# Altium PCB DATN_PCB_ver1.PcbDoc (part 1 of 2)
Units mm, origin at the board's own origin, x right, y up, seen from the top; angles counter-clockwise.
Board outline 70 x 59.97 mm, 2 copper layers (Top Layer, Bottom Layer), stack 1.569 mm thick; 103 components, 87 nets, 412 pads, 112 vias.
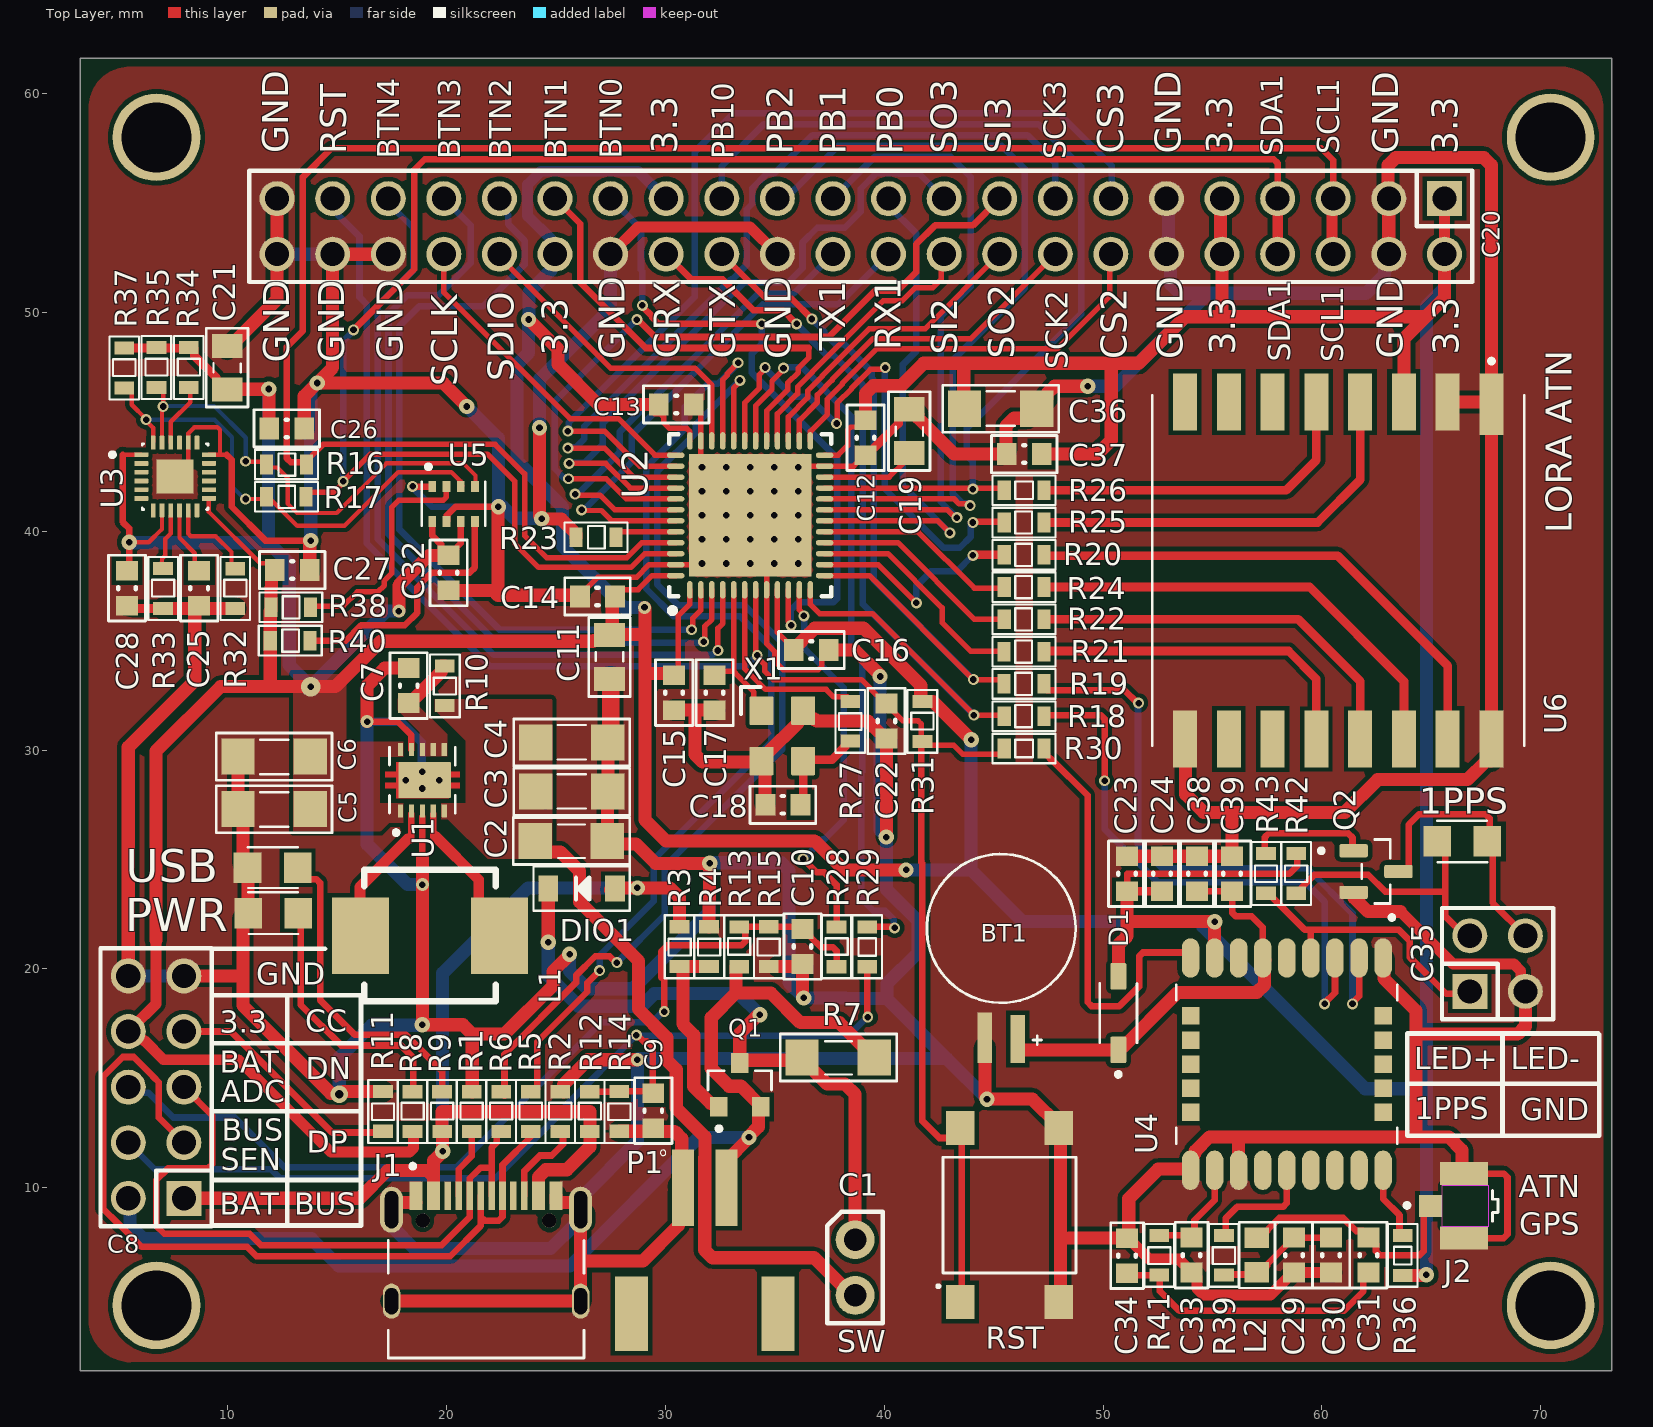
[diagram p0: Top Layer view]
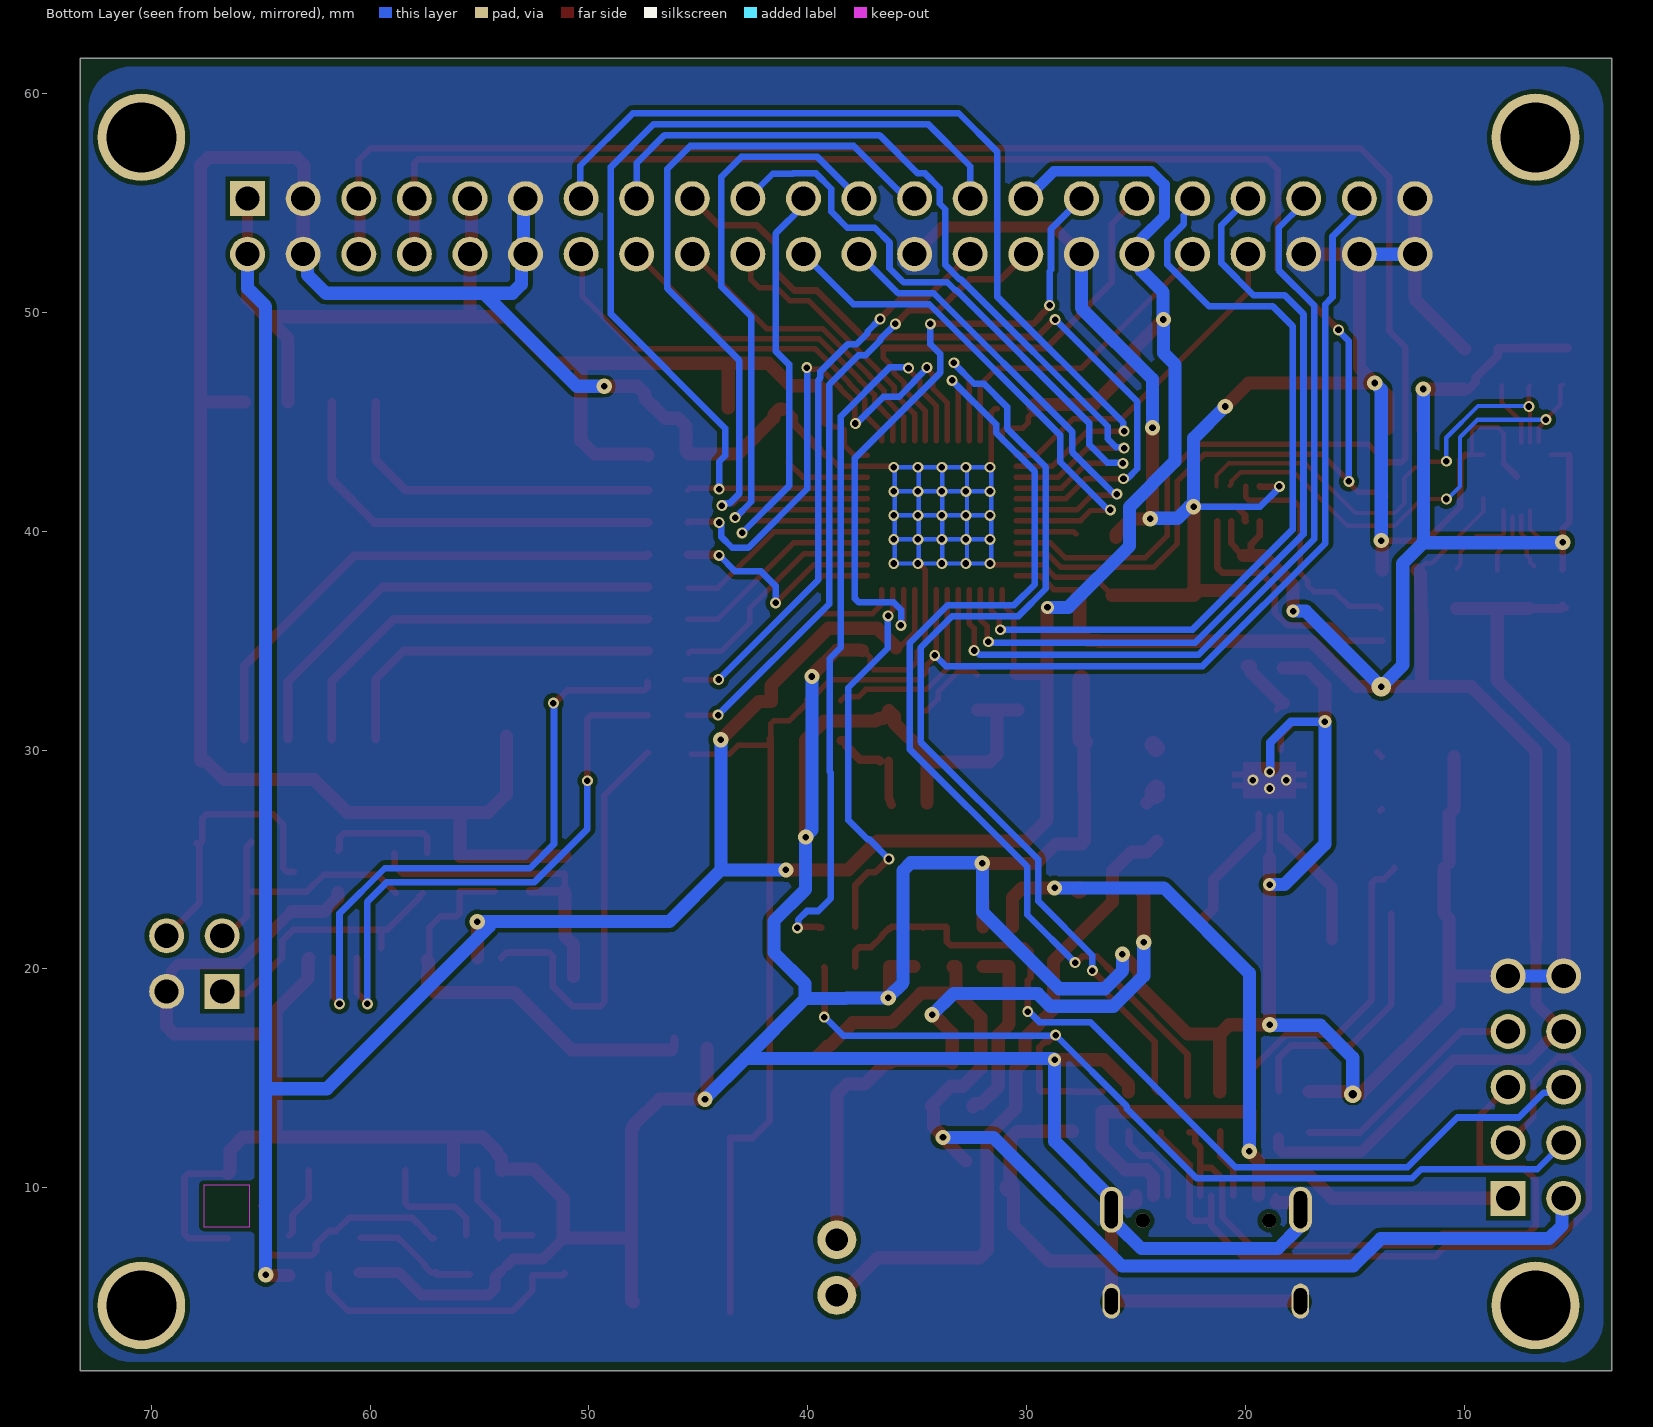
[diagram p1: Bottom Layer view, seen from below]
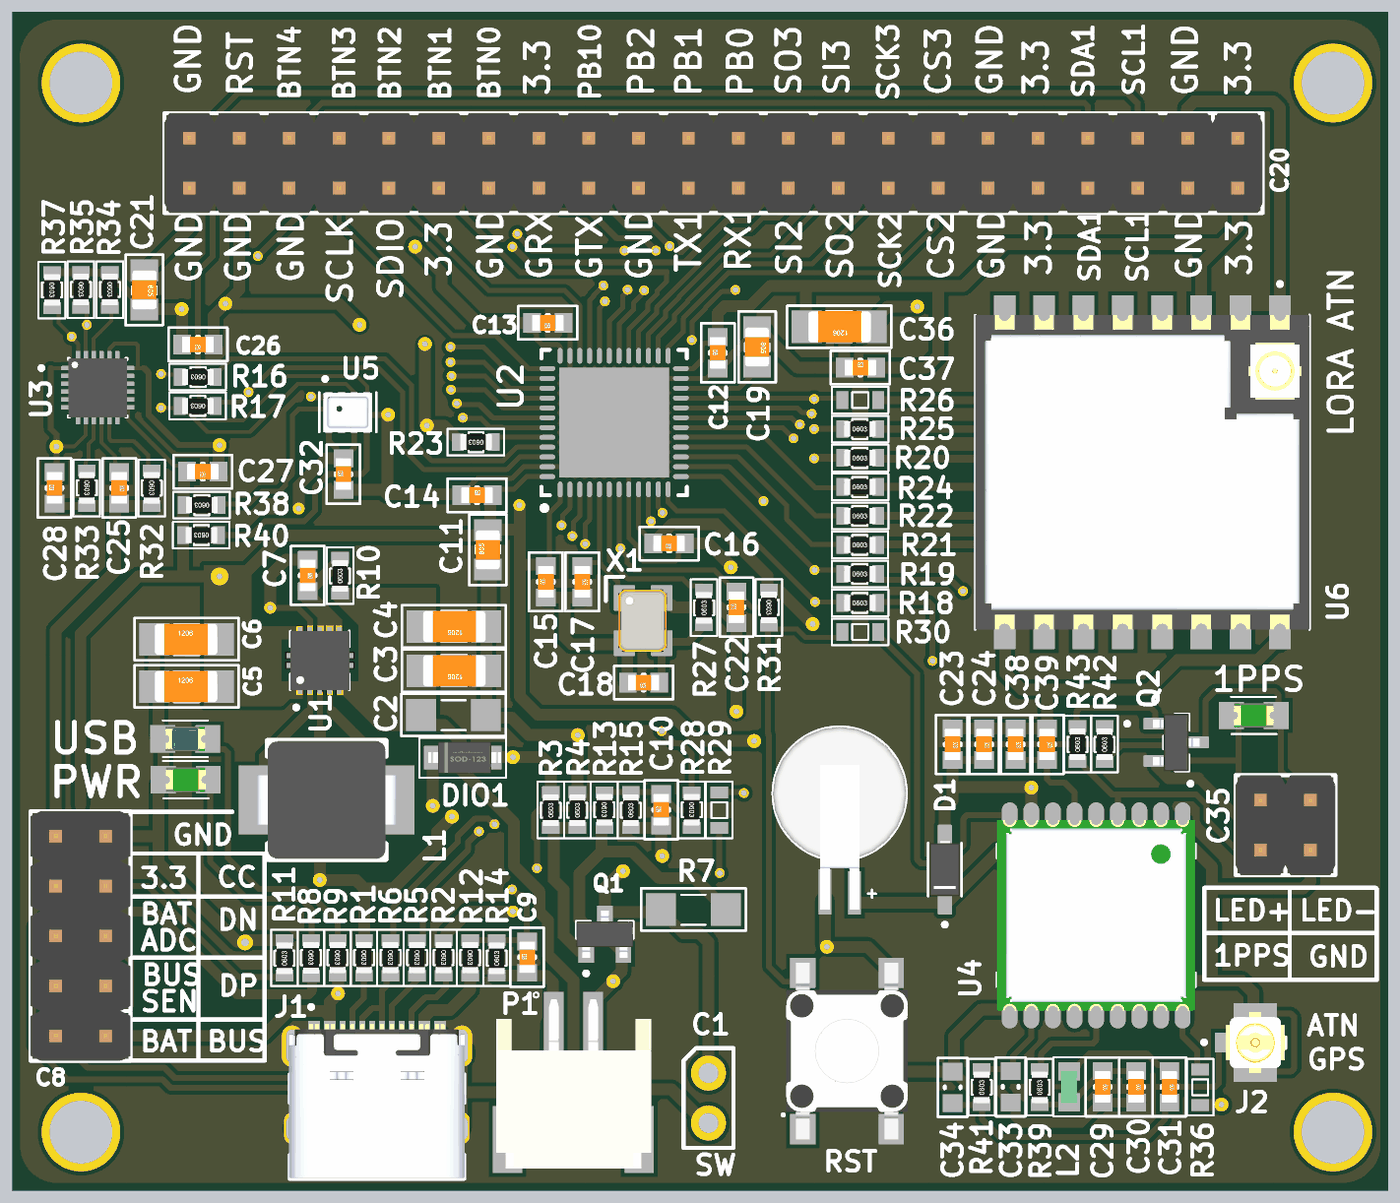
[diagram p3: 3D render of the assembled board from above, using the file's embedded part models]

## Layer stack, top to bottom
Top Solder: solder mask 0.0254, SM-001, Dk 4
Top Layer: signal copper 0.035
Dielectric 1: core 1.4986, Core-043, Dk 4.3
Bottom Layer: signal copper 0.035
Bottom Solder: solder mask 0.0254, SM-001, Dk 4

## Board outline
3.258,1.648 73.254,1.648 73.254,61.621 3.258,61.621

## Design rules (kind name [scope] priority, off if disabled: settings)
BoardOutlineClearance [All] p1: gap=0.254 ignorepadtopadclearanceinfootprint=FALSE except(0: Arc-SplitContinuation Track-SplitContinuation SMDPad-SplitContinuation THPad-SplitContinuation Via-SplitContinuation Fill-SplitContinuation Poly-SplitContinuation Region-SplitContinuation Text-SplitContinuation)
Clearance [All] p1: gap=0.2 ignorepadtopadclearanceinfootprint=TRUE except(0.19: Arc-SMDPad Track-SMDPad)
HoleSize [All] p1: absolutevalues=TRUE maxlimit=6.3 minlimit=0.3 maxpercent=80.000 minpercent=20.000
HoleToHoleClearance [All] p1: gap=0.25 allowstackedmicrovias=TRUE
MinimumSolderMaskSliver [All] p1: minsoldermaskwidth=0.1
PlaneConnect [All] p1: planeconnectstyle=Direct reliefexpansion=0.508 reliefentries=2 reliefconductorwidth=0.254 reliefairgap=0.254
PolygonConnect [All] p1: connectstyle=Direct reliefconductorwidth=0.254 reliefentries=4 polygonreliefangle="90 Angle" airgapwidth=0
RoutingVias [All] p1: holewidth=0.4 width=1.27 viastyle="Through Hole" minholewidth=0.2 minwidth=0.4 maxholewidth=6.3 maxwidth=6.3
ShortCircuit [InPadClass('All Pads') vs InPadClass('All Pads')] p1: allowed=FALSE
SilkToSilkClearance [All] p1: silktosilkclearance=0.1
SilkToSolderMaskClearance [IsPad] p1: minsilkscreentomaskgap=0.15 clearancetoexposedcopper=TRUE
SolderMaskExpansion [All] p1: expansion=0 istentingtop=FALSE
SupplyNets "Schematic Supply Nets_5" [InNet('VBUS')] p1: voltage=0.000
SupplyNets "Schematic Supply Nets_4" [InNet('GND_OUT')] p2: voltage=0.000
SupplyNets "Schematic Supply Nets_3" [InNet('V_PWR')] p3: voltage=0.000
SupplyNets "Schematic Supply Nets_2" [InNet('3.3V_OUT')] p4: voltage=0.000
SupplyNets "Schematic Supply Nets_1" [InNet('GPS_VBAT')] p5: voltage=0.000
SupplyNets "Schematic Supply Nets" [InNet('VBAT')] p6: voltage=0.000
UnRoutedNet [All] p1: checkbadconnections=TRUE
Width [All] p1: maxlimit=1 minlimit=0.2 preferedwidth=0.3
22 further rules are at their usual default settings.

## Components (designator, comment, footprint, x,y, rotation, side; value= is the part's Value field where it differs from the comment)
1PPS "LED" LED-0805-Green 65.275,25.825 r0 top value="LED 3 - 5 ly 2 Colour" (schematic designator LED3)
BT1 "MS621FE-FL11E" BAT_MS621FE-FL11E 45.35,21.85 r270 top
C1 "JP2" JP2-CLOSED 38.675,7.625 r0 top
C2 "Pad" PAD-SMD-1206 25.725,25.85 r180 top value=33pF
C3 "100uF" CN-SMD-1206 25.75,28.1 r180 top value=33pF
C4 "10uF" CN-SMD-1206 25.75,30.35 r180 top value=33pF
C5 "10uF" CN-SMD-1206 12.1,27.3 r0 top value=33pF
C6 "10uF" CN-SMD-1206 12.1,29.7 r0 top value=33pF
C7 "100nF" CN-SMD-0603 18.275,32.95 r270 top value=33pF
C8 "JP5x2" JP5-D2T 6.73,14.6 r90 top
C9 "100nF" CN-SMD-0603 29.45,13.525 r90 top value=33pF
C10 "100nF" CN-SMD-0603 36.275,21.025 r90 top value=33pF
C11 "2.2uF" CN-SMD-0805 27.45,34.25 r90 top value=33pF
C12 "100nF" CN-SMD-0603 39.15,44.275 r90 top value=33pF
C13 "100nF" CN-SMD-0603 30.5,45.8 r180 top value=33pF
C14 "100nF" CN-SMD-0603 26.9,37.025 r0 top value=33pF
C15 "100nF" CN-SMD-0603 30.4,32.625 r90 top value=33pF
C16 "100nF" CN-SMD-0603 36.675,34.575 r180 top value=33pF
C17 "15pF" CN-SMD-0603 32.25,32.625 r270 top value=33pF
C18 "15pF" CN-SMD-0603 35.375,27.5 r180 top value=33pF
C19 "2.2uF" CN-SMD-0805 41.15,44.575 r270 top value=33pF
C20 "JP22x2" JP22-D2T 38.93,53.93 r180 top
C21 "2.2uF" CN-SMD-0805 9.975,47.475 r270 top value=33pF
C22 "100nF" CN-SMD-0603 40.1,31.331 r90 top value=33pF
C23 "100nF" CN-SMD-0603 51.1,24.35 r270 top value=33pF
C24 "33nF" CN-SMD-0603 52.7,24.35 r270 top value=33pF
C25 "100nF" CN-SMD-0603 8.7,37.4 r270 top value=33pF
C26 "100nF" CN-SMD-0603 12.7,44.7 r180 top value=33pF
C27 "10nF" CN-SMD-0603 12.95,38.225 r180 top value=33pF
C28 "10nF" CN-SMD-0603 5.4,37.4 r90 top value=33pF
C29 "100pF" CN-SMD-0603 58.725,6.925 r270 top value=33pF
C30 "10nF" CN-SMD-0603 60.425,6.925 r270 top value=33pF
C31 "100pF" CN-SMD-0603 62.125,6.925 r270 top value=33pF
C32 "100nF" CN-SMD-0603 20.1,38.1 r90 top value=33pF
C33 "PAD" PAD-CAP-SMD-0603 54.05,6.925 r270 top value=33pF
C34 "PAD" PAD-CAP-SMD-0603 51.1,6.9 r90 top value=33pF
C35 "JP2x2" JP2-D2T 68.03,20.245 r0 top
C36 "22uF" CN-SMD-1206 45.35,45.6 r180 top value=33pF
C37 "100nF" CN-SMD-0603 46.4,43.525 r0 top value=33pF
C38 "100nF" CN-SMD-0603 54.3,24.35 r270 top value=33pF
C39 "33nF" CN-SMD-0603 55.9,24.35 r270 top value=33pF
D1 "1N4148W-7" SOD3715X135N 50.7,17.98 r90 top
DIO1 "Diode SMD" DIO-SMD-123 26.175,23.675 r0 top value=1N5007
J1 "CQ-USB-C16PSMT01" SHENZHEN-CHUANGQIN-TECHNOLOGY_CQ-USB-C16PSMT01 21.81,9.64 r0 top
J2 "IPEX" IPEX_20279-001E-03 66.5,9.175 r270 top
L1 "2.2uH" INDC6060X300 19.25,21.525 r0 top
L2 "68nH" SMD_Inductor_0603 57.025,6.925 r90 top
P1 "S2B-PH-SM4-TB" JST_S2B-PH-SM4-TB 31.8,10 r180 top
PWR "LED GREEN" LED-0805-Green 13.225,22.55 r180 top value="LED 3 - 5 ly 2 Colour" (schematic designator LED1)
Q1 "P_MOSFET" P_MOSFET_SOT23 33.4,14.7 r90 top
Q2 "N_MOSFET" SOT-23-3 62.475,24.45 r0 top
R1 "5.1K" RES-SMD-0603 21.15,13.502 r270 top
R2 "5.1K" RES-SMD-0603 25.2,13.502 r270 top
R3 "22R" RES-SMD-0603 30.65,21 r90 top
R4 "10K" RES-SMD-0603 32,21 r90 top
R5 "22R" RES-SMD-0603 23.85,13.502 r270 top
R6 "22R" RES-SMD-0603 22.5,13.502 r270 top
R7 "Pad" PAD-SMD-1206 37.925,15.95 r180 top
R8 "1.5K" RES-SMD-0603 18.45,13.5 r270 top
R9 "2K" RES-SMD-0603 19.8,13.502 r270 top
R10 "100R" RES-SMD-0603 19.925,32.923 r90 top
R11 "5.1K" RES-SMD-0603 17.1,13.475 r90 top
R12 "80K" RES-SMD-0603 26.55,13.502 r270 top
R13 "66K" RES-SMD-0603 33.375,21.025 r270 top
R14 "200K" RES-SMD-0603 27.9,13.475 r90 top
R15 "200K" RES-SMD-0603 34.725,21 r90 top
R16 "0R" RES-SMD-0603 12.707,43.047 r180 top
R17 "0R" RES-SMD-0603 12.7,41.575 r180 top
R18 "0R" RES-SMD-0603 46.375,31.55 r0 top
R19 "0R" RES-SMD-0603 46.373,33.025 r0 top
R20 "0R" RES-SMD-0603 46.375,38.925 r0 top
R21 "0R" RES-SMD-0603 46.373,34.5 r0 top
R22 "0R" RES-SMD-0603 46.375,35.975 r0 top
R23 "10K" RES-SMD-0603 26.85,39.725 r180 top
R24 "0R" RES-SMD-0603 46.375,37.45 r0 top
R25 "0R" RES-SMD-0603 46.375,40.4 r0 top
R26 "PAD" PAD-RES-SMD-0603 46.375,41.875 r0 top
R27 "0R" RES-SMD-0603 38.45,31.3 r90 top
R28 "0R" RES-SMD-0603 37.825,21.025 r270 top
R29 "PAD" PAD-RES-SMD-0603 39.225,21.025 r270 top
R30 "PAD" PAD-RES-SMD-0603 46.375,30.075 r0 top
R31 "10K" RES-SMD-0603 41.75,31.325 r270 top
R32 "10K" RES-SMD-0603 10.35,37.4 r270 top
R33 "10K" RES-SMD-0603 7.05,37.402 r270 top
R34 "10K" RES-SMD-0603 8.225,47.5 r270 top
R35 "4.7K" RES-SMD-0603 6.75,47.5 r270 top
R36 "PAD" PAD-RES-SMD-0603 63.7,6.925 r270 top
R37 "4.7K" RES-SMD-0603 5.275,47.477 r270 top
R38 "10K" RES-SMD-0603 12.9,36.525 r180 top
R39 "10R" RES-SMD-0603 55.525,6.9 r90 top
R40 "10K" RES-SMD-0603 12.875,35 r180 top
R41 "0R" RES-SMD-0603 52.575,6.898 r90 top
R42 "1K" RES-SMD-0603 58.825,24.35 r90 top
R43 "1K" RES-SMD-0603 57.45,24.35 r90 top
RST "SW" SW2-SMD 45.725,8.75 r90 top value="Button chip 4 pin" (schematic designator SW1)
U1 "TPS63001DRCR" VREG_V62/16624-01YE 18.9,28.625 r90 top
U2 "STM32F411CEU6" STM-UFQFPN48_L 33.875,40.725 r90 top
U3 "MPU-9250" QFN40P300X300X105-25N 7.6,42.5 r0 top
U4 "LC76G" XCVR_LC76G 58.4,15.65 r270 top
U5 "BMP280" XDCR_BMP280 20.325,41.25 r90 top
U6 "RA-02_LORA" MODULE_RA-02_LORA 60.75,38.2 r270 top
USB "LED GREEN" LED-0805-Blue 13.2,24.625 r180 top value="LED 3 - 5 ly 2 Colour" (schematic designator LED2)
X1 "XTAL_3225_25MHZ" XTAL_3225 35.35,30.65 r270 top

## Footprints (in the part's own frame and the unit in brackets; to place one, negate y for a bottom-side part, rotate by r counter-clockwise, add the part's x,y. Pads: shape width x height; smd on the part's side, far side on the other; paste and mask are expansions set on the pad)
BAT_MS621FE-FL11E [mm]
  rect 2.3x0.65 smd: NEG(5,-0.75)
  rect 2.2x0.65 smd: POS(5.05,0.75)
  silkscreen extent -3.4,-3.4 5.3,3.4, body extent -3.4,-3.4 5.9,3.4, height 2.8
CN-SMD-0603 [mm]
  rect 0.9x1 smd: 1(-0.8,0) 2(0.8,0)
  silkscreen extent -1.5,-0.85 1.5,0.85, body extent -0.8,-0.4 0.8,0.4, height 0.3
CN-SMD-0805 [mm]
  rect 1.1x1.397 smd: 1(-1,0) 2(1,0)
  silkscreen extent -1.8,-0.95 1.8,0.95, body extent -1,-0.62 1,0.63, height 0.8
CN-SMD-1206 [mil]
  rect 60x65 smd: 1(-64,0) 2(66,0)
  silkscreen extent -103,-42 105,42, body extent -63,-31 63,32, height 40
DIO-SMD-123 [mm]
  rect 0.9x1.2 smd: 1(1.524,0) 2(-1.524,0)
  silkscreen extent -2.2,-1.02 2.2,1.02, body extent -1.76,-0.8 1.94,0.8, height 1.25
INDC6060X300 [mm]
  rect 2.6x3.5 smd: 1(-3.175,0) 2(3.175,0)
  silkscreen extent -3,-3 3,3, body extent -3.55,-3 3.55,3, height 3
IPEX_20279-001E-03 [mm]
  rect 1x1.05 smd: 1(0,-1.525)
  rect 1.05x2.2 smd: 2(1.475,0) 3(-1.475,0)
  Keep-Out Layer region: 0.95,-1 -0.95,-1 -0.95,1.1 0.95,1.1
  silkscreen extent -0.7,-2.71 0.7,1.55, body extent -1.5,-1.55 1.5,1.55, height 1.25
JP2-CLOSED [mil]
  round 70 hole 40: 1(0,0) 2(0,-100)
  silkscreen extent -50,-150 50,50, body extent -50,-152 50,50, height 300
JP2-D2T [mm] "4 pins, dual pin, straight, gold plating"
  rect 1.6x1.6 hole 1.1: 1(-1.27,-1.27)
  round 1.6 hole 1.1: 2(1.27,-1.27) 3(1.27,1.27) 4(-1.27,1.27)
  silkscreen extent -2.54,-2.54 2.54,2.54, body extent -2.54,-2.54 2.54,2.54, height 8.55
JP5-D2T [mm] "10 pins, dual pin, straight, gold plating"
  rect 1.6x1.6 hole 1.1: 1(-5.08,-1.27)
  round 1.6 hole 1.1: 2(-2.54,-1.27) 3(0,-1.27) 4(2.54,-1.27) 5(5.08,-1.27) 6(5.08,1.27) 7(2.54,1.27) 8(0,1.27) 9(-2.54,1.27) 10(-5.08,1.27)
  silkscreen extent -6.35,-2.54 6.35,2.54, body extent -6.35,-2.54 6.35,2.54, height 8.55
JP22-D2T [mm] "44 pins, dual pin, straight, gold plating"
  rect 1.6x1.6 hole 1.1: 1(-26.67,-1.27)
  round 1.6 hole 1.1: 2(-24.13,-1.27) 3(-21.59,-1.27) 4(-19.05,-1.27) 5(-16.51,-1.27) 6(-13.97,-1.27) 7(-11.43,-1.27) 8(-8.89,-1.27) 9(-6.35,-1.27) 10(-3.81,-1.27) 11(-1.27,-1.27) 12(1.27,-1.27) 13(3.81,-1.27) 14(6.35,-1.27) 15(8.89,-1.27) 16(11.43,-1.27) 17(13.97,-1.27) 18(16.51,-1.27) 19(19.05,-1.27) 20(21.59,-1.27) 21(24.13,-1.27) 22(26.67,-1.27) 23(26.67,1.27) 24(24.13,1.27) 25(21.59,1.27) 26(19.05,1.27) 27(16.51,1.27) 28(13.97,1.27) 29(11.43,1.27) 30(8.89,1.27) 31(6.35,1.27) 32(3.81,1.27) 33(1.27,1.27) 34(-1.27,1.27) 35(-3.81,1.27) 36(-6.35,1.27) 37(-8.89,1.27) 38(-11.43,1.27) 39(-13.97,1.27) 40(-16.51,1.27) 41(-19.05,1.27) 42(-21.59,1.27) 43(-24.13,1.27) 44(-26.67,1.27)
  silkscreen extent -27.94,-2.54 27.94,2.54, body extent -27.94,-2.54 27.94,2.54, height 8.55
JST_S2B-PH-SM4-TB [mm]
  rect 1x3.5 smd: 1(1,0) 2(-1,0)
  rect 1.5x3.4 smd: P1(3.35,5.75) P2(-3.35,5.75)
  silkscreen extent 1.77,-1.73 2.03,-1.47, body extent -3.96,-1.38 3.94,7.22, height 5.5
LED-0805-Blue [mil]
  rect 50x55 smd: 1(0,0) 2(90,0)
  silkscreen extent 0,-37 90,36, body extent 5,-25 85,25, height 43
LED-0805-Green [mil]
  rect 50x55 smd: 1(0,0) 2(90,0)
  silkscreen extent 0,-37 91,37, body extent 5,-25 85,25, height 43
MODULE_RA-02_LORA [mm]
  rect 2.8x1.1 smd: 1(-7.6,7)
  rect 2.6x1.1 smd: 2(-7.7,5) 3(-7.7,3) 4(-7.7,1) 5(-7.7,-1) 6(-7.7,-3) 7(-7.7,-5) 8(-7.7,-7) 9(7.7,-7) 10(7.7,-5) 11(7.7,-3) 12(7.7,-1) 13(7.7,1) 14(7.7,3) 15(7.7,5) 16(7.7,7)
  silkscreen extent -9.68,-8.5 8,8.5, body extent -8,-8.5 8,8.5, height 3.3
P_MOSFET_SOT23 [mm]
  rect 0.9x0.8 smd: 1(-1,0.95) 2(-1,-0.95) 3(1,0)
  silkscreen extent -2.1,-1.45 0.65,1.45, body extent -1.2,-1.45 1.2,1.45, height 1.2
PAD-CAP-SMD-0603 [mm]
  rect 0.9x1 smd: 1(-0.8,0) 2(0.8,0)
  silkscreen extent -1.5,-0.75 1.5,0.75
PAD-RES-SMD-0603 [mm]
  rect 0.6x0.9 smd: 1(-0.889,0) 2(0.927,0)
  silkscreen extent -1.43,-0.67 1.45,0.67
PAD-SMD-1206 [mil]
  rect 60x65 smd: 1(-64,0) 2(66,0)
  silkscreen extent -104,-42 105,42
QFN40P300X300X105-25N [mm]
  rrect25% 0.64x0.22 smd: 1(-1.545,1) 2(-1.545,0.6) 3(-1.545,0.2) 4(-1.545,-0.2) 5(-1.545,-0.6) 6(-1.545,-1) 13(1.545,-1) 14(1.545,-0.6) 15(1.545,-0.2) 16(1.545,0.2) 17(1.545,0.6) 18(1.545,1)
  rrect25% 0.22x0.64 smd: 7(-1,-1.545) 8(-0.6,-1.545) 9(-0.2,-1.545) 10(0.2,-1.545) 11(0.6,-1.545) 12(1,-1.545) 19(1,1.545) 20(0.6,1.545) 21(0.2,1.545) 22(-0.2,1.545) 23(-0.6,1.545) 24(-1,1.545)
  rect 1.7x1.54 smd paste-2: 25(0,0)
  silkscreen extent -2.96,-1.5 1.5,1.5, body extent -1.5,-1.5 1.5,1.5, height 1.05
RES-SMD-0603 [mm]
  rect 0.6x0.9 smd: 1(-0.889,0) 2(0.927,0)
  silkscreen extent -1.43,-0.68 1.45,0.67, body extent -0.8,-0.4 0.8,0.4, height 0.43
SHENZHEN-CHUANGQIN-TECHNOLOGY_CQ-USB-C16PSMT01 [mm]
  rect 0.6x1.3 smd: A1_B12(-3.2,0) A4_B9(-2.4,0) B1_A12(3.2,0) B4_A9(2.4,0)
  rect 0.3x1.3 smd: A5(-1.25,0) A6(-0.25,0) A7(0.25,0) A8(1.25,0) B5(1.75,0) B6(0.75,0) B7(-0.75,0) B8(-1.75,0)
  oval 1.05x2.1 hole 0.6 slot 1.7 at 90 deg: S1(-4.32,-0.64) S2(4.32,-0.64)
  oval 0.8x1.6 hole 0.6 slot 1.2 at 90 deg: S3(-4.32,-4.82) S4(4.32,-4.82)
  round 0.65 hole 0.65 unplated: ""(-2.89,-1.14) ""(2.89,-1.14)
  silkscreen extent -4.47,-7.42 4.47,1.45, body extent -4.47,-7.33 4.47,0.48, height 3.26
SMD_Inductor_0603 [mm]
  rect 0.94x1.11 smd: 1(-0.789,0) 2(0.789,0)
  silkscreen extent -1.5,-0.82 1.5,0.8, body extent -0.8,-0.4 0.8,0.4, height 1
SOD3715X135N [mm]
  rrect18% 1.21x0.73 smd: A(1.68,0) C(-1.68,0)
  silkscreen extent -2.9,-0.85 1.35,0.85, body extent -1.83,-0.77 1.83,0.77, height 0.74
SOT-23-3 [mm]
  rrect25% 1.3x0.6 smd: 1(-1.025,0.95) 2(-1.025,-0.95) 3(1.025,0)
  silkscreen extent -2.6,-1.46 0.65,1.46, body extent -1.18,-1.46 1.18,1.46, height 1.12
STM-UFQFPN48_L [mm] "QFN, 48-Leads, Body 7.1x7.1mm, Pitch 0.5mm, Thermal Pad 5.6x5.6mm, IPC High Density"
  oval 0.8x0.25 smd: 1(-3.4,2.75) 2(-3.4,2.25) 3(-3.4,1.75) 4(-3.4,1.25) 5(-3.4,0.75) 6(-3.4,0.25) 7(-3.4,-0.25) 8(-3.4,-0.75) 9(-3.4,-1.25) 10(-3.4,-1.75) 11(-3.4,-2.25) 12(-3.4,-2.75) 25(3.4,-2.75) 26(3.4,-2.25) 27(3.4,-1.75) 28(3.4,-1.25) 29(3.4,-0.75) 30(3.4,-0.25) 31(3.4,0.25) 32(3.4,0.75) 33(3.4,1.25) 34(3.4,1.75) 35(3.4,2.25) 36(3.4,2.75)
  oval 0.25x0.8 smd: 13(-2.75,-3.4) 14(-2.25,-3.4) 15(-1.75,-3.4) 16(-1.25,-3.4) 17(-0.75,-3.4) 18(-0.25,-3.4) 19(0.25,-3.4) 20(0.75,-3.4) 21(1.25,-3.4) 22(1.75,-3.4) 23(2.25,-3.4) 24(2.75,-3.4) 37(2.75,3.4) 38(2.25,3.4) 39(1.75,3.4) 40(1.25,3.4) 41(0.75,3.4) 42(0.25,3.4) 43(-0.25,3.4) 44(-0.75,3.4) 45(-1.25,3.4) 46(-1.75,3.4) 47(-2.25,3.4) 48(-2.75,3.4)
  rect 5.6x5.6 smd: 49(0,0)
  silkscreen extent -4.47,-3.7 3.7,3.7, body extent -3.55,-3.55 3.55,3.55, height 0.6
SW2-SMD [mm] "6*6mm vertical type, SMD, height 5.0mm, black actuator, 160gf, T&R"
  rect 1.55x1.3 smd: 1(-3.975,2.25) 2(-3.975,-2.25) 3(3.975,-2.25) 4(3.975,2.25)
  silkscreen extent -3.29,-3.04 2.65,3.29, body extent -4.5,-3.1 4.5,3.1, height 4.99
VREG_V62/16624-01YE [mm]
  rrect25% 0.6x0.24 smd mask+0: 1(-1.4,1) 2(-1.4,0.5) 3(-1.4,0) 4(-1.4,-0.5) 5(-1.4,-1) 6(1.4,-1) 7(1.4,-0.5) 8(1.4,0) 9(1.4,0.5) 10(1.4,1)
  rrect5% 1.65x2.4 smd paste-2 mask+0: 11(0,-0.1)
  Top Layer region: 0.375,1.2 0.825,1.2 0.825,-1.2 0.375,-1.2 0.375,-1.7 0.125,-1.7 0.125,-1.2 -0.125,-1.2 -0.125,-1.7 -0.375,-1.7 -0.375,-1.2 -0.825,-1.2 -0.825,1.2 -0.375,1.2 -0.375,1.7 -0.125,1.7 -0.125,1.2 0.125,1.2 0.125,1.7 0.375,1.7
  silkscreen extent -2.49,-1.5 1.5,1.5, body extent -1.5,-1.5 1.5,1.5, height 1
XCVR_LC76G [mm]
  oval 1.8x0.8 smd: 1(-4.85,4.4) 2(-4.85,3.3) 3(-4.85,2.2) 4(-4.85,1.1) 5(-4.85,0) 6(-4.85,-1.1) 7(-4.85,-2.2) 8(-4.85,-3.3) 9(-4.85,-4.4) 10(4.85,-4.4) 11(4.85,-3.3) 12(4.85,-2.2) 13(4.85,-1.1) 14(4.85,0) 15(4.85,1.1) 16(4.85,2.2) 17(4.85,3.3) 18(4.85,4.4)
  rect 0.8x0.8 smd: 19(2.2,4.4) 20(1.1,4.4) 21(0,4.4) 22(-1.1,4.4) 23(-2.2,4.4) 24(-2.2,-4.4) 25(-1.1,-4.4) 26(0,-4.4) 27(1.1,-4.4) 28(2.2,-4.4)
  silkscreen extent -6.8,-5.05 3.63,5.05, body extent -4.85,-5.05 4.85,5.05, height 2.65
XDCR_BMP280 [mm]
  rect 0.5x0.35 smd: 1(0.8,0.975) 2(0.8,0.325) 3(0.8,-0.325) 4(0.8,-0.975) 5(-0.8,-0.975) 6(-0.8,-0.325) 7(-0.8,0.325) 8(-0.8,0.975)
  silkscreen extent -1,-1.45 1.79,1.45, body extent -1,-1.25 1,1.25, height 1
XTAL_3225 [mm]
  rrect10% 1.3x1.1 smd: 1(-1.15,-0.95) 2(1.15,-0.95) 3(1.15,0.95) 4(-1.15,0.95)
  silkscreen extent -2.23,-1.89 -1,-1, body extent -1.6,-1.28 1.6,1.22, height 0.61

## Part data
1PPS PWR USB: library part "LED SMD"
BT1: "Coin, 6.8mm 3 V Lithium Battery Rechargeable (Secondary) 5.5mAh", Package="QFP-128 Seiko", Availability="In Stock", Check_prices=https://www.snapeda.com/parts/MS621FE-FL11E/Seiko+Instruments/view-part/?ref=eda, MF="Seiko Instruments", MP=MS621FE-FL11E, Price=None, Purchase-URL=https://pricing.snapeda.com/search/part/MS621FE-FL11E/?ref=eda, SnapEDA_Link=https://www.snapeda.com/parts/MS621FE-FL11E/Seiko+Instruments/view-part/?ref=snap
C1: "WR-PHD 2.54 mm Angled Socket Header", Manufacturer="W¨¹rth Elektronik eiSos GmbH", partNo=613002143121, ComponentLink1 Description=Manufacturer, ComponentLink1URL=http://www.we-online.com, ComponentLink2 Description=Datasheet, ComponentLink2URL=http://katalog.we-online.de/em/datasheet/6130xx143121.pdf, Created by="Karrer Zheng", Created Date="29 March 2013", NoPins=02
C2 C3 C4 C5 C6 C7 C9 C10 C11 C12 C13 C14 C15 C16 C17 C18 C19 C21 C22 C23 C24 C25 C26 C27 C28 C29 C30 C31 C32 C33 C34 C36 C37 C38 C39: library part Cap-SMD
C8: "WR-PHD 2.54 mm Dual Socket Header", Manufacturer="W¨¹rth Elektronik eiSos GmbH", partNo=61301021821, ComponentLink1 Description=Manufacturer, ComponentLink1URL=http://www.we-online.com, ComponentLink2 Description=Datasheet, ComponentLink2URL=http://katalog.we-online.de/em/datasheet/6130xx21821.pdf, Created by="Karrer Zheng", Created Date="29 March 2013", NoPins=10
C20: "WR-PHD 2.54 mm Dual Socket Header", Manufacturer="W¨¹rth Elektronik eiSos GmbH", partNo=61304421821, ComponentLink1 Description=Manufacturer, ComponentLink1URL=http://www.we-online.com, ComponentLink2 Description=Datasheet, ComponentLink2URL=http://katalog.we-online.de/em/datasheet/6130xx21821.pdf, Created by="Karrer Zheng", Created Date="29 March 2013", NoPins=44
C35: "WR-PHD 2.54 mm Dual Socket Header", Manufacturer="W¨¹rth Elektronik eiSos GmbH", partNo=61300421821, ComponentLink1 Description=Manufacturer, ComponentLink1URL=http://www.we-online.com, ComponentLink2 Description=Datasheet, ComponentLink2URL=http://katalog.we-online.de/em/datasheet/6130xx21821.pdf, Created by="Karrer Zheng", Created Date="29 March 2013", NoPins=04
D1: "Diode Standard 100 V 300mA (DC) Surface Mount SOD-123", Package="SOD-123 Fairchild Semiconductor", Availability="In Stock", Check_prices=https://www.snapeda.com/parts/1N4148W-7/Diodes+Inc./view-part/?ref=eda, MF="Diodes Inc.", MP=1N4148W-7, Price=None, Purchase-URL=https://pricing.snapeda.com/search/part/1N4148W-7/?ref=eda, SnapEDA_Link=https://www.snapeda.com/parts/1N4148W-7/Diodes+Inc./view-part/?ref=snap
DIO1: "Default Diode", Code - JEDEC=DO-214-AB, Published=8-Jun-2000, Publisher="Altium Limited", Revision="July-2002: Re-released for DXP Platform."
J1: "C Type USB Type-C Female Plug 16 Pin Connector Power Charger Jack Port", Package=Package, Check_prices=https://www.snapeda.com/parts/CQ-USB-C16PSMT01/Shenzen+Chuangqin+Technology/view-part/?ref=eda, MF="Shenzen Chuangqin Technology", MP=CQ-USB-C16PSMT01, SnapEDA_Link=https://www.snapeda.com/parts/CQ-USB-C16PSMT01/Shenzen+Chuangqin+Technology/view-part/?ref=snap
J2: "1 POS Vertical SMD Small form factor with big performance through 6 GHz connector,MHF, RF, micro-coaxial MHF I Receptacle", Package=None, Check_prices=https://www.snapeda.com/parts/20279-001E-03/I-PEX/view-part/?ref=eda, MF=I-PEX, MP=20279-001E-03, SnapEDA_Link=https://www.snapeda.com/parts/20279-001E-03/I-PEX/view-part/?ref=snap
L1 L2: library part SMD-Wire-Inductor, "INDUCTOR wire-wound", Package=None, Availability=Unavailable, MP=LQW2BAN68NG00L, Price=None
P1: "Connector Header Surface Mount, Right Angle 2 position 0.079 (2.00mm)", Package=None, Check_prices=https://www.snapeda.com/parts/S2B-PH-SM4-TB/JST/view-part/?ref=eda, MF="JST Sales", MP=S2B-PH-SM4-TB, SnapEDA_Link=https://www.snapeda.com/parts/S2B-PH-SM4-TB/JST/view-part/?ref=snap
Q1: Package="SOT-23 Diotec", Check_prices=https://www.snapeda.com/parts/MMFTP3401/Diotec/view-part/?ref=eda, MF="Diotec Semiconductor", MP=MMFTP3401, SnapEDA_Link=https://www.snapeda.com/parts/MMFTP3401/Diotec/view-part/?ref=snap
Q2: Package="SOT-23-3 Vishay Siliconix", Check_prices=https://www.snapeda.com/parts/SI2306BDS-T1-GE3/Vishay/view-part/?ref=eda, MF="Vishay Siliconix", MP=SI2306BDS-T1-GE3, SnapEDA_Link=https://www.snapeda.com/parts/SI2306BDS-T1-GE3/Vishay/view-part/?ref=snap
R1 R2 R3 R4 R5 R6 R7 R8 R9 R10 R11 R12 R13 R14 R15 R16 R17 R18 R19 R20 R21 R22 R23 R24 R25 R26 R27 R28 R29 R30 R31 R36 R39 R41 R42 R43: library part Res-SMD, "Resistor", Manufacturer="Generic Components", Class=Passive, Published=08/06/2000, Publisher="Altium Hobart Technology Centre"
R32 R33 R34 R35 R37 R38 R40: library part Res-SMD, Manufacturer="Generic Components", Class=Passive, Published=08/06/2000, Publisher="Altium Hobart Technology Centre"
RST: library part SW4, "Switch button 4 pin"
U1: "96% Buck-Boost Converter with 1.7A Current Switches, 3.3V fixed Output voltage in 3x3 QFN", Package="VSON-10 Texas Instruments", Check_prices=https://www.snapeda.com/parts/TPS63001DRCR/Texas+Instruments/view-part/?ref=eda, MF="Texas Instruments", MP=TPS63001DRCR, SnapEDA_Link=https://www.snapeda.com/parts/TPS63001DRCR/Texas+Instruments/view-part/?ref=snap
U2: "ARM Cortex-M4 32-bit MCU+FPU, 512 KB Flash, 128 KB RAM, 36 I/Os, 48-Pin UFQFPN, -40 to 85 degC, Tray", I/Os (High Current)=36, Operating Frequency(F) (Processor speed) (MHz)=100, Package Description=UFQFPN48, Package Reference="48-Pin Ultra Thin Fine Pitch Quad Flat No-Lead, 7 x 7 x 0.6 mm Body, 0.5 mm Pitch, Exposed Pad", Supply Voltage(Vcc) min (V)=1.7, ComponentLink1Description="Manufacturer URL", ComponentLink1URL=http://www.st.com/, ComponentLink2Description=Datasheet, ComponentLink2URL=http://www.st.com/st-web-ui/static/active/en/resource/technical/document/datasheet/DM00115249.pdf, Core="ARM Cortex-M4", DatasheetVersion="Rev. 6", FLASH Size (Prog) (kB)=512, Internal RAM Size (kB)=128, Mounting Technology="Surface Mount", Packing=Tray
U3: "MPU-9250 series Accelerometer, Gyroscope, Humidity, Magnetometer, Pressure, Temperature Sensor Evaluation Board", Package="TFQFN-24 TDK InvenSense", Check_prices=https://www.snapeda.com/parts/MPU-9250/TDK+InvenSense/view-part/?ref=eda, MF="TDK InvenSense", MP=MPU-9250, SnapEDA_Link=https://www.snapeda.com/parts/MPU-9250/TDK+InvenSense/view-part/?ref=snap
U4: Package=None, Availability=Unavailable, MF=Quectel, MP=LC76G, Price=None
U5: "BMP280 Absolute Barometric Pressure Sensor for Battery Powered Devices 2 x 2.5mm", Package=None, Availability=Unavailable, MP=BMP280, Price=None
U6: "Ra-02 LoRa RF M5Stack Platform Evaluation Expansion Board", Package=None, Availability=Unavailable, MP=RA-02_LORA, Price=None
X1: library part "XTAL 4 Pin", "Crystal Oscillator"

## Free pads (board coordinates)
  round 4 hole 3.2: 2(6.75,4.625) 2(6.75,58) 2(70.45,4.625) 2(70.45,58)

## Via types
v1: diameter 0.5, hole 0.3, Top Layer to Bottom Layer, 79 vias
v2: diameter 0.7, hole 0.3, Top Layer to Bottom Layer, 26 vias
v3: diameter 0.6, hole 0.3, Top Layer to Bottom Layer, 5 vias
v4: diameter 0.8, hole 0.4, Top Layer to Bottom Layer, 1 vias
v5: diameter 0.9, hole 0.3, Top Layer to Bottom Layer, 1 vias

## Nets (pads, with @x,y where several pads share a name; then routed paths per layer and width w, separated by ;. In a path a pad name is that pad's centre, name@x,y a point inside that pad or via, vN(x,y) a via of type N, cw(c..) or ccw(c..) an arc to the next point about the centre after c; other vN are vias at no path point)
3.3V_OUT: C5.2 C6.2 C8.7 C11.2 C12.2 C13.2 C14.2 C15.2 C16.2 C20.1 C20.5 C20.15 C20.28 C20.40 C20.44 C21.2 C23.2 C24.2 C26.2 C27.2 C28.2 C32.2 C36.2 C37.2 D1.A R8.2 R31.1 R34.1 R35.1 R36.2 R37.1 R38.2 R40.2 R42.2 U1.1 U1.10 U2.1 U2.9 U2.24 U2.36 U2.48 U3.1 U3.8 U3.13 U4.8 U5.6 U5.8 U6.3 | length 362.4
  Top Layer w0.2: 5.2,43.5 U3.1@6.055,43.5 ; v2(5.5,39.5) 6.4,39.5 7,40.1 U3.8@7,40.955 ; U3.13@9.145,41.5 9.145,40.88 11.49,38.535 11.8,38.535 11.9,38.435 C27.2@11.9,38.385
  Top Layer w0.25: C14.2@27.6,37.3 27.629,37.329 28.754,37.329 29.4,37.975 U2.48@30.475,37.975 ; C13.2@29.525,45.361 29.789,45.361 29.925,45.225 29.925,44.961 30.186,44.7 30.979,44.7 31.125,44.554 U2.36@31.125,44.125 ; C15.2@30.4,33.425 30.585,33.61 30.585,36.135 31.125,36.675 U2.1@31.125,37.325 ; U2.9@35.125,37.325 35.125,35.375 C16.2@35.875,34.625 ; U2.24@37.275,43.475 37.9,43.475 38.335,43.91 38.335,44.617 38.481,44.763 38.838,44.763 C12.2@39.15,45.075
  Top Layer w0.3: 5.2,43.5 5.2,40.425 5.5,40.125 v2(5.5,39.5) C28.2@5.5,38.25 ; C5.2@13.776,27.3 C5.2@13.851,27.225 ; C6.2@13.776,29.7 C6.2@13.976,29.9 ; U5.8@19.35,40.45 19.35,39.8 19.75,39.4 19.75,38.925 C32.2@19.775,38.9 ; C32.2@20.15,38.9 20.45,39.2 20.45,39.25 20.65,39.45 U5.6@20.65,40.45 ; C23.2@51.1,23.55 51.1,24.35 58.519,24.35 58.872,24.703 58.872,25.249 R42.2@58.9,25.277
  Top Layer w0.4: R37.1@5.275,48.375 7.414,48.375 7.425,48.364 R34.1@8.45,48.364 ; R34.1@8.475,48.364 8.475,48.025 9.477,47.023 9.477,46.825 9.852,46.45 C21.2@10.05,46.45 ; C21.2@10.036,46.5 C21.2@10.049,46.487 ; v2@11.862,46.487 v2(11.875,46.5) v2@11.887,46.488 ; C26.2@11.887,44.612 C26.2@11.9,44.6 ; C23.2@51.1,23.55 51.15,23.55 C24.2@52.7,23.55
  Top Layer w0.5: C8.7@5.46,17.14 5.758,17.14 6.191,16.706 6.219,16.706 7.075,15.85 10.5,15.85 14.725,11.625 18.302,11.625 18.5,11.823 R8.2@18.5,12.275 ; C8.7@5.663,17.343 6.725,18.405 6.725,21.3 ; C20.44@65.6,52.66 65.6,55.15 C20.1@65.65,55.2
  Top Layer w0.6: 6.725,21.3 6.725,29.95 9.675,32.9 v5(13.8,32.9) 14.925,32.9 17,34.975 26.7,34.975 26.725,35 27.2,35 27.575,35.375 27.575,36.9 C14.2@27.7,37.025 ; C21.2@10.049,46.487 v2@11.862,46.487 ; C26.2@11.887,44.612 v2@11.887,46.488 ; 11.948,33.175 R40.2@11.948,35 11.948,36.35 11.973,36.375 R38.2@11.973,36.5 ; R38.2@11.973,36.525 11.973,37.425 ; 12,37.425 12,38.075 C27.2@12.15,38.225 ; v3(17.825,36.35) 17.825,37.525 19.2,38.9 19.775,38.9 C32.2@20.1,38.9 ; v2(23.75,49.675) 25.1,48.325 25.1,47.625 26.925,45.8 29.65,45.8 C13.2@29.725,45.725 ; C11.2@27.7,35.275 29.075,35.275 ; v3(29.049,36.524) 29.075,36.499 29.075,35.275 ; C15.2@30.475,33.5 29.075,33.5 ; C16.2@35.975,34.675 35.975,34.725 36.566,35.316 36.573,35.316 36.822,35.565 39.06,35.565 41.669,32.956 41.669,32.214 R31.1@41.75,32.214 ; C12.2@39.15,45.075 39.15,46.299 39.501,46.65 40.775,46.65 41.8,47.675 43.635,47.675 ; v2@40.95,24.483 40.908,24.525 38.148,24.525 36.823,25.85 30.025,25.85 29.075,26.8 29.075,33.5 ; R31.1@41.9,32.214 42.236,32.214 v2(43.975,30.475) ; C36.2@43.635,45.625 43.635,47.675 ; C37.2@47.3,43.475 47.35,43.525 49.75,43.525 50.375,44.15 50.375,47.675 ; D1.A@50.7,19.66 50.7,21.1 51.1,21.5 51.1,22.175 ; C23.2@51.15,23.55 51.1,23.5 51.1,22.175 ; U4.8@55.1,20.5 v2(55.1,22.15) 55.075,22.175 51.1,22.175 ; C20.40@55.375,52.66 C20.5@55.375,55.375 ; C20.40@55.44,52.66 55.44,49.865 55.375,49.8 ; R36.2@63.7,5.998 64.748,5.998 v2(64.775,6.025) ; U6.3@63.75,45.9 63.75,48.8 64.75,49.8 ; C20.44@65.6,52.66 65.6,50.65 64.75,49.8 ; 29.075,33.5 29.075,35.275 ; 43.635,47.675 50.375,47.675 ; 50.375,47.675 51.625,47.675 53.75,49.8 55.375,49.8 ; 55.375,49.8 64.75,49.8
  Bottom Layer w0.5: C20.28@24.96,52.66 24.75,52.87 24.75,53.375 23.71,54.415 23.71,55.835 24.325,56.45 28.75,56.45 C20.15@30,55.2
  Bottom Layer w0.6: v2@5.475,39.45 5.5,39.475 11.875,39.475 ; v2(11.875,46.5) 11.875,39.475 ; v3(17.825,36.35) 17.25,36.35 v5(13.8,32.9) 12.818,33.882 12.818,38.532 11.875,39.475 ; C20.28@24.95,52.65 24.769,52.469 24.769,51.919 23.769,50.919 23.769,49.694 v2(23.75,49.675) 23.75,48.15 23.225,47.625 23.225,43.189 25.3,41.114 25.3,39.325 28.101,36.524 v3(29.049,36.524) ; v2(41,24.525) 43.968,24.525 ; v2@44,30.475 43.968,30.443 43.968,24.525 ; 54.55,21.95 61.975,14.525 64.625,14.525 64.775,14.375 ; v2(55.1,22.15) 55.075,22.175 46.318,22.175 43.968,24.525 ; v2(64.775,6.025) 64.775,14.375 ; C20.44@65.6,52.66 65.6,51.1 64.775,50.275 64.775,14.375
ADC1: R28.1 U2.11 | length 17.9
  Top Layer w0.25: U2.11@36.125,37.325 36.125,36.407 36.332,36.2 v1(36.332,36.133)
  Top Layer w0.3: v1(36.3,25.025) 36.911,24.414 37.252,24.414 37.825,23.841 R28.1@37.825,21.921
  Bottom Layer w0.3: v1(36.3,25.025) 37.207,25.932 37.282,25.932 38.15,26.8 38.15,32.85 36.35,34.65 36.35,36.115 v1(36.332,36.133)
CC1: J1.A5 R1.2 | length 3.2
  Top Layer w0.3: J1.A5@20.56,9.64 20.56,10.85 21.15,11.44 R1.2@21.15,12.575
CC2: J1.B5 R2.2 | length 4
  Top Layer w0.3: J1.B5@23.56,9.64 23.56,10.766 24.269,11.475 24.807,11.475 25.325,11.993 R2.2@25.325,12.573
DN: C8.3 J1.A7 J1.B7 R6.2 | length 30.4
  Top Layer w0.3: C8.3@8,14.6 9.3,13.3 9.3,11.076 9.124,10.9 7.299,10.9 7.069,10.67 7.055,10.67 6.73,10.345 6.73,8.27 7.1,7.9 11,7.9 11.525,7.375 19.775,7.375 21.06,8.66 J1.B7@21.06,9.64 21.06,10.435 21.265,10.64 21.279,10.64 21.564,10.925 22.06,10.925 ; J1.A7@22.06,9.64 22.06,10.925 ; R6.2@22.575,12.537 22.407,12.537 22.293,12.423 22.293,12.068 22.06,11.835 22.06,10.925
DP: C8.2 J1.A6 J1.B6 R5.2 | length 38.3
  Top Layer w0.3: C8.2@8,12.06 6.85,13.21 6.85,14.822 6.61,15.062 6.61,15.076 5.711,15.975 5.209,15.975 4.31,15.076 4.31,9.044 4.984,8.37 4.998,8.37 6.068,7.3 10.893,7.3 11.318,6.875 20.175,6.875 21.56,8.26 21.56,8.676 ; J1.A6@21.56,9.64 21.56,8.676 ; R5.2@23.875,12.525 23.875,12.359 22.56,11.044 J1.B6@22.56,9.64 22.56,8.676 22.384,8.5 21.736,8.5 21.56,8.676